# EAGLE board MEMS-preamp_v08 (EAGLE 8.6.1)
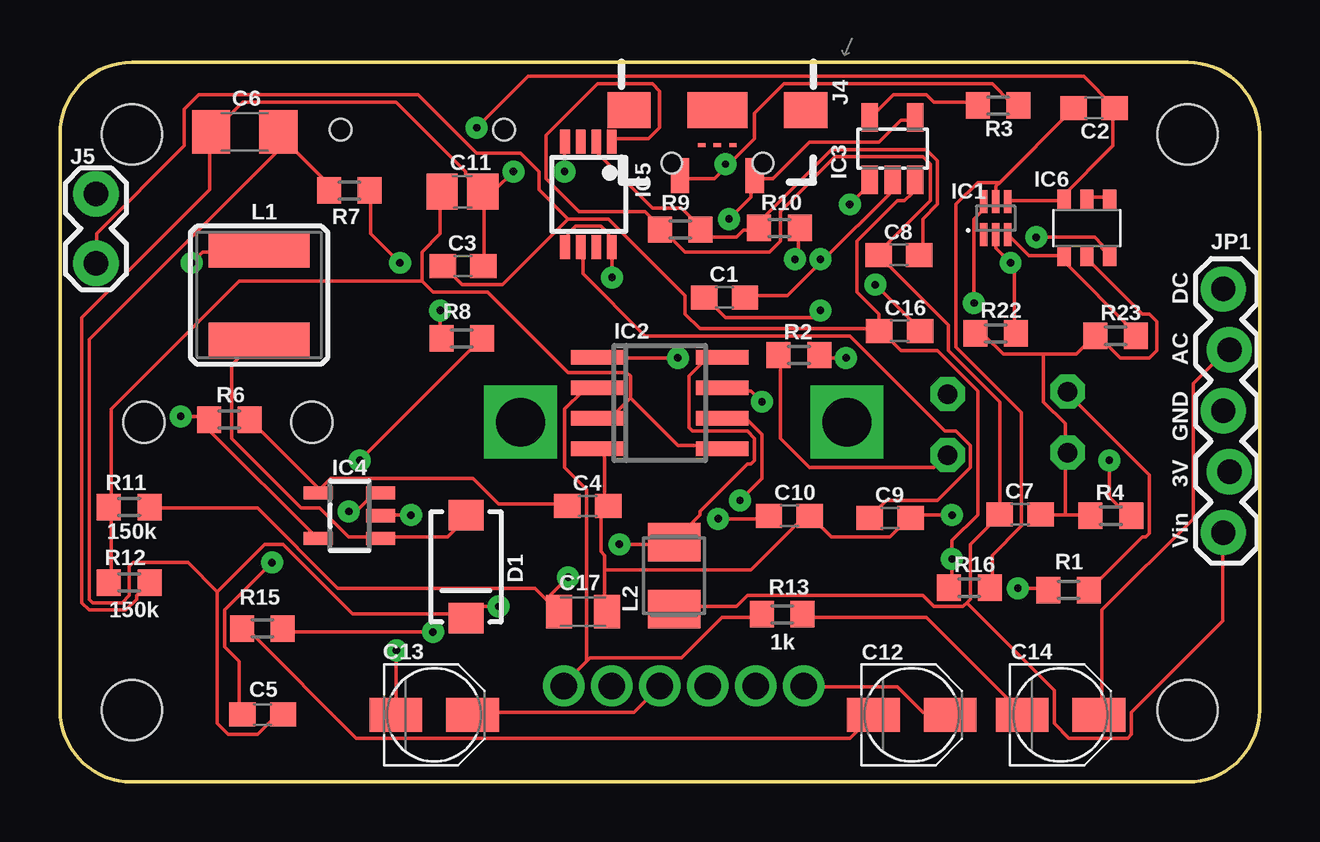
[diagram p0: board, top side]
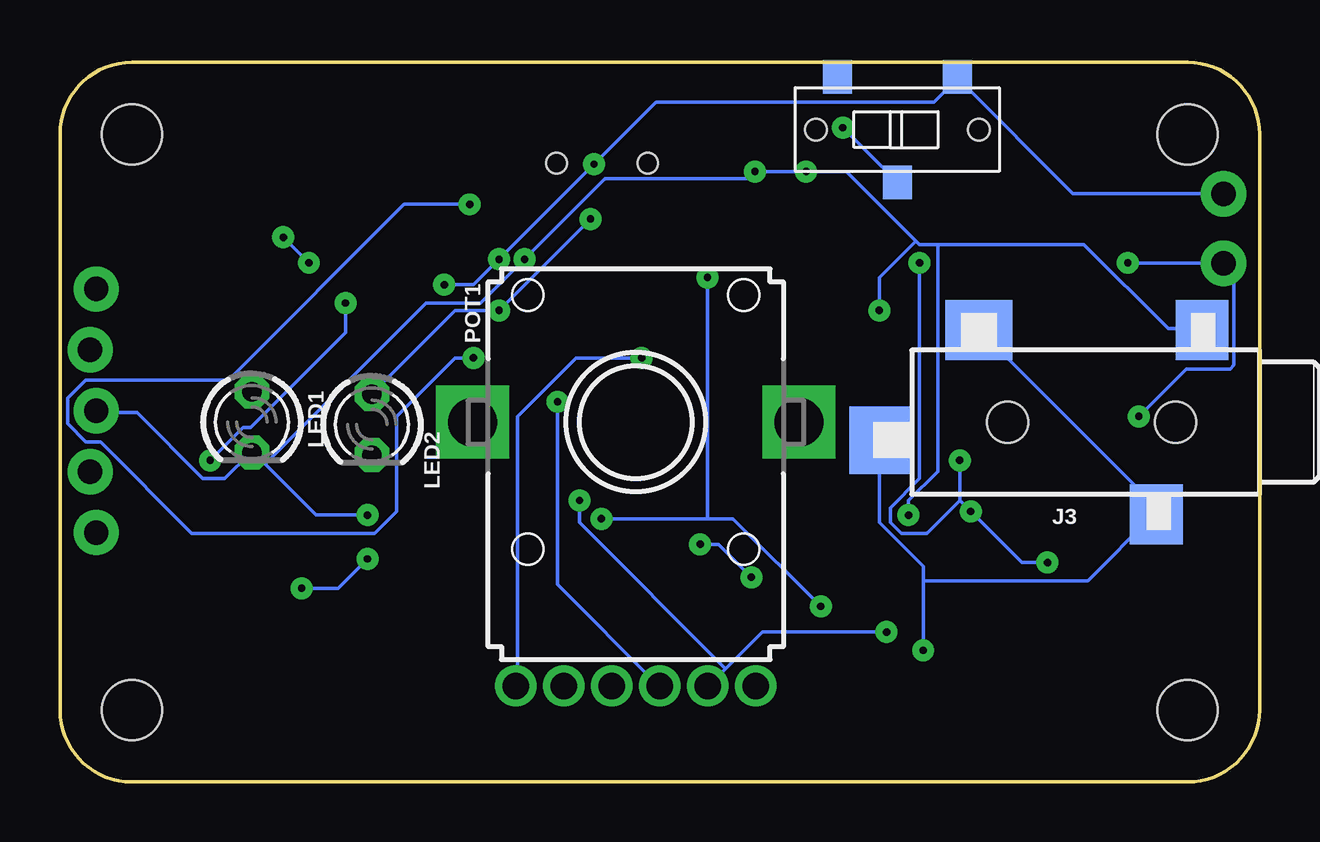
[diagram p1: board, bottom side, seen from below]

Size 50 x 30 mm. Coordinates in mm from the lower left corner, seen from the top.
Outline: 0,3 0,27 arc-90 3,30 47,30 arc-90 50,27 50,3 arc-90 47,0 3,0 arc-90 0,3
Copper layers (1*16): Top 0.035mm / dielectric 1.5mm / Bottom 0.035mm
Design rules "default *": minimum track width 6mil, minimum drill 12mil, track to track 6mil, track to pad 6mil, pad to pad 6mil, via to via 6mil, smd to smd 6mil, copper to edge 6mil, drill to drill 6mil, minimum pad ring 12mil, minimum via ring 12mil, stop-mask expansion 4mil, vias tented up to drill 0mil, thermal gap 10mil
Holes 2.5 mm at 47,27 47,3 3,27 3,3

## Footprints (pad centres in the part's own frame; a part is rotated, then mirrored left to right if it is on the bottom)
C0603 = smd 1.1 x 1: 1 -0.85,0; 2 0.85,0
C1206 = smd 1.6 x 1.8: 1 -1.4,0; 2 1.4,0
C0805 = smd 1.3 x 1.5: 1 -0.85,0; 2 0.85,0
PANASONIC_B = smd 2.2 x 1.4: + 1.6,0; - -1.6,0
C0805K = smd 1.1 x 1.4: 1 -1,0; 2 1,0
SMA-DIODE = smd 1.27 x 1.47: A -2.15,0; C 2.15,0
WSON-6-LONG = smd 0.3 x 0.954: 1 -0.5,-0.686; 2 0,-0.686; 3 0.5,-0.686; 4 0.5,0.686; 5 0,0.686; 6 -0.5,0.686
SO08 = smd 0.6 x 2.2: 1 -1.905,-2.6; 2 -0.635,-2.6; 3 0.635,-2.6; 4 1.905,-2.6; 5 1.905,2.6; 6 0.635,2.6; 7 -0.635,2.6; 8 -1.905,2.6
SOT-23-5 = smd 0.69 x 1.2: 1 -0.95,-1.3; 2 0,-1.3; 3 0.95,-1.3; 4 0.95,1.3; 5 -0.95,1.3
SOT23-5 = smd 0.55 x 1.2: 1 -0.95,-1.3; 2 0,-1.3; 3 0.95,-1.3; 4 0.95,1.3; 5 -0.95,1.3
MSOP-8 = smd 0.4 x 1: 1 -0.975,-2.2; 2 -0.325,-2.2; 3 0.325,-2.2; 4 0.975,-2.2; 5 0.975,2.2; 6 0.325,2.2; 7 -0.325,2.2; 8 -0.975,2.2
SOT457R_PHILIPS = smd 0.55 x 0.8: 1 -0.95,-1.2; 2 0,-1.2; 3 0.95,-1.2; 4 0.95,1.2; 5 0,1.2; 6 -0.95,1.2
TRS_SJ-3524-SMT = smd 2.5 x 2.2: 1 3.85,-4.6; 3 -3.85,-2.7 | smd 2.5 x 2.8: 2 3.85,4.7 | smd 2.8 x 2.5: 4 -0.75,8.85 | hole 1.7: 0,-3.5; 0,3.5
USB-B-MICRO-SMD_RED_PASTE = smd 0.152 x 0.305: D+ 1.455,0; D- 1.455,0.65; ID 1.455,-0.65 | smd 1.45 x 0.762: GND 2.725,-1.554 | smd 1.5 x 1.8: SHIELD1 0,3.685; SHIELD2 0,-3.685 | smd 1.5 x 2.5: SHIELD3 0,0 | smd 1.45 x 0.781: VBUS 2.725,1.554 | hole 0.85: 2.2,1.9; 2.2,-1.9
1X02_LOCK = drill 1.016 pad 1.88: 1 -0.178,0; 2 2.718,0
1X05_LOCK = drill 1.016 pad 1.88: 1 0,0.127; 2 2.54,-0.127; 3 5.08,0.127; 4 7.62,-0.127; 5 10.16,0.127
CR54 = smd 4.2 x 1.4: P$1 0,1.85; P$2 0,-1.85
L3225M = smd 1.6 x 2.2: 1 -1.4,0; 2 1.4,0
LED3MM = drill 0.813 octagon: A -1.27,0; K 1.27,0
PTV112 = drill 1.1 pad 1.676: 1.1 -3,-11; 1.2 -5,-11; 1.3 5,-11; 2.1 -1,-11; 2.2 1,-11; 2.3 3,-11 | drill 2.032 pad 2.8 square: M1 -6.8,0; M2 6.8,0
R0603 = smd 1 x 1.1: 1 -0.85,0; 2 0.85,0
SWITCH_SPDT_CL-SB-12B = smd 1.2 x 1.4: P$1 -2.5,-2.2; P$2 0,2.2; P$3 2.5,-2.2 | hole 0.9: -3.4,0; 3.4,0

## Placement (x,y rotation side)
C1  4.7uF  [C0603]  27.7,20.2 0 top
C2  0.1uF  [C0603]  43.1,28.1 180 top
C3  10uF  [C0603]  16.8,21.5 0 top
C4  56nF  [C0603]  22,11.5 0 top
C5  2.2pF  [C0603]  8.45,2.82 180 top
C6  68uF  [C1206]  7.7,27.1 180 top
C7  10uF  [C0603]  40.02,11.16 0 top
C8  10nF  [C0603]  34.97,21.96 0 top
C9  10nF  [C0603]  34.6,11 0 top
C10  10uF  [C0603]  30.4,11.1 0 top
C11  0.1uF  [C0805]  16.77,24.6 0 top
C12  10uF  [PANASONIC_B]  35.5,2.8 0 top
C13  10uF  [PANASONIC_B]  15.6,2.8 0 top
C14  10uF  [PANASONIC_B]  41.7,2.8 0 top
C16  4.7uF  [C0603]  35,18.8 0 top
C17  0.1uF  [C0805K]  21.8,7.1 0 top
D1  10BQ015  [SMA-DIODE]  16.93,8.97 270 top
IC1  BQ297X  [WSON-6-LONG]  39,23.5 0 top
IC2  OPA2134UA  [SO08]  25,15.8 270 top
IC3  MCP73831  [SOT-23-5]  34.7,26.4 0 top
IC4  SC4503  [SOT23-5]  12.06,11.1 90 top
IC5  TPS7A49  [MSOP-8]  22.02,24.49 180 top
IC6  QS6K1  [SOT457R_PHILIPS]  42.8,23.1 0 top
J3  TRS-1/8"-3.5MM  [TRS_SJ-3524-SMT]  7,15 90 bottom
J4  [USB-B-MICRO-SMD_RED_PASTE]  27.4,28 270 top
J5  Battery  [1X02_LOCK]  1.5,21.8 90 top
JP1  ICS40300  [1X05_LOCK]  48.62,10.39 90 top
L1  2.7uH  [CR54]  8.3,20.3 0 top
L2  100uH/500mA  [L3225M]  25.6,8.6 90 top
LED1  [LED3MM]  42,15 270 bottom
LED2  Charge  [LED3MM]  37,14.9 270 bottom
POT1  20K  [PTV112]  26,15 0 bottom
R1  390  [R0603]  42.04,8 180 top
R2  470  [R0603]  30.8,17.8 0 top
R3  5k  [R0603]  39.1,28.2 180 top
R4  2.2k  [R0603]  43.8,11.1 0 top
R6  15k  [R0603]  7.06,15.1 180 top
R7  1M  [R0603]  12.06,24.66 180 top
R8  100k  [R0603]  16.75,18.49 0 top
R9  100k  [R0603]  25.85,23.03 0 top
R10  11k  [R0603]  29.99,23.09 0 top
R11  150k  [R0603]  2.89,11.46 0 top
R12  150k  [R0603]  2.89,8.31 180 top
R13  1k  [R0603]  30.1,6.99 180 top
R15  1k  [R0603]  8.44,6.39 0 top
R16  330  [R0603]  37.9,8.1 0 top
R22  10M  [R0603]  39,18.7 0 top
R23  10M  [R0603]  44,18.6 0 top
SW3  SPDT  [SWITCH_SPDT_CL-SB-12B]  15.1,27.2 180 bottom

## Library data of the parts
C1-C10 C16 = rcl; SPICEPREFIX: C
C11 C17 = adafruit
C12-C14 = resistor
D1 = SparkFun
IC1 IC3-IC6 J3 R1-R4 R6-R13 R15 R16 R22 R23 SW3 = CMU-ArtFab
IC2 = linear
J4 = CMU-ArtFab; PROD_ID: CONN-11752
J5 = SparkFun-Connectors; G: (-); P: (+)
JP1 = SparkFun-Connectors; CON1: Vin; CON2: 3V; CON3: GND; CON4: AC; CON5: DC
L1 = SparkFun-Passives
L2 = rcl; SPICEPREFIX: L
LED1 LED2 = led
POT1 = CMU-ArtFab; AVAILABILITY: Unavailable; DESCRIPTION: Alt# Tce-10111410; MF: STMicroelectronics; MP: PTV112; PACKAGE: None; PRICE: None

## Nets
+5V: C1.1 IC3.4 J4.VBUS LED2.A
+12V: C7.1 C8.1 IC5.1 JP1.1 L2.1 R9.1
BATGND: C2.1 IC1.4 IC6.6 SW3.P$2
GND: C3.2 C4.2 C6.2 C7.2 C9.2 C10.2 C11.2 C17.2 IC2.4 IC4.2 IC5.4 IC6.2 J3.1 JP1.3 LED1.K R4.1 R8.1 R10.2 R12.1 R22.1 R23.1
N$2: LED1.A R1.1
N$3: C14.+ JP1.4
N$4: C12.- R15.1
N$5: IC2.2 POT1.1.3 R13.2
N$6: IC3.5 R3.2
N$7: C13.- J3.2 J3.3 J3.4
N$8: C11.1 IC2.3 IC2.5 R11.1 R12.2
N$9: C12.+ IC2.1 POT1.1.2
N$10: C13.+ IC2.7 POT1.2.2
N$11: IC6.4 IC6.5
N$12: D1.A IC4.1 L1.P$2
N$13: C4.1 IC4.4 R6.1
N$14: C5.2 IC4.3 R7.1 R8.2
N$15: C17.1 IC2.8 L2.2 R11.2
N$21: IC2.6 POT1.2.3 R15.2
N$22: LED2.K R2.1
N$23: C14.- R13.1
N$25: IC3.1 R2.2
N$27: IC1.3 IC6.1 R23.2
N$31: IC1.2 IC6.3 R22.2
N$34: IC1.6 R4.2
N$42: C2.2 IC1.5 R16.2
N$47: C8.2 IC5.2 R9.2 R10.1
N$48: C9.1 IC5.6
USBGND: C1.2 C16.2 IC3.2 J4.GND J5.2 R3.1 SW3.P$1
V+: C5.1 C6.1 C10.1 D1.C IC5.5 IC5.8 R7.2
VBAT: C3.1 C16.1 IC3.3 IC4.5 J5.1 L1.P$1 R1.2 R6.2 R16.1

## Tracks (layer width: path | path; a pad name or v marks a point on that pad's centre or on a via)
+5V  (via drill 0.3)
  Top 0.152: IC3.4 35.51,27.58 35.05,27.58 34.14,26.67 31.24,26.67 29.72,25.15 28.96,25.15 J4.VBUS 28.8,25.15 28.8,24.38 v27.89,23.47 | v31.7,19.66 31.39,19.36 27.74,19.36 26.98,20.12 C1.1
  Bottom 0.152: LED2.A 36.88,16.31 33.53,19.66 v31.7,19.66 v27.89,23.47
+12V
  Top 0.152: IC5.1 23.01,26.82 24.54,26.82 24.99,27.28 24.99,28.8 24.69,29.11 22.4,29.11 20.27,26.98 20.27,25.15 21.64,23.77 24.38,23.77 24.99,23.16 R9.1 25.15,23.01 26.06,22.1 29.57,22.1 30.02,22.55 30.02,23.77 32.31,26.06 35.97,26.06 36.27,25.76 36.27,24.23 34.14,22.1 C8.1 34.14,21.95 37.03,19.05 37.03,17.98 39.17,15.85 39.17,11.28 C7.1 39.17,11.12 37.95,9.91 37.95,7.62 37.8,7.47 | 37.8,7.47 37.64,7.32 36.42,7.32 35.97,7.77 28.65,7.77 28.19,7.32 25.6,7.32 L2.1 | 37.8,7.47 41.45,3.81 41.45,2.44 42.06,1.83 44.5,1.83 44.65,1.98 44.65,2.9 48.46,6.71 48.46,10.36 JP1.1
BATGND  (via drill 0.3)
  Top 0.152: IC1.4 39.62,24.23 41.76,24.23 IC6.6 41.76,24.38 43.89,26.52 43.89,28.04 C2.1 43.89,28.19 42.67,29.41 19.51,29.41 v17.37,27.28
  Bottom 0.152: v17.37,27.28 15.24,25.15 SW3.P$2
GND  (via drill 0.3)
  Top 0.152: IC2.4 22.4,13.87 22.71,13.56 22.71,11.58 C4.2 22.71,11.43 22.55,11.28 22.55,9.6 22.71,9.45 22.71,8.84 | 22.71,8.84 22.71,7.16 C17.2 | 22.71,8.84 28.8,8.84 30.94,10.97 31.24,10.97 C10.2 31.39,10.97 32.16,10.21 34.59,10.21 35.36,10.97 C9.2 35.51,11.12 v37.19,11.12 | 41.91,11.12 42.82,11.12 R4.1 | 41.91,11.12 41,11.12 C7.2 | 41.91,11.12 41.91,13.72 LED1.K 41.91,13.87 41.91,14.94 41,15.85 41,17.83 | IC6.2 42.82,21.79 45.11,19.51 45.41,19.51 45.72,19.2 45.72,17.98 45.41,17.68 44.2,17.68 43.28,18.59 R23.1 43.13,18.59 42.37,17.83 41,17.83 | 41,17.83 39.32,17.83 38.56,18.59 38.25,18.59 R22.1 | C3.2 17.68,21.64 17.68,24.54 C11.2 | R12.1 3.66,8.23 3.2,7.77 3.2,7.62 2.74,7.16 1.22,7.16 0.91,7.47 0.91,19.36 6.25,24.69 6.25,26.98 C6.2 6.4,27.13 7.62,28.35 14.02,28.35 16.92,25.45 16.92,25.3 17.53,24.69 C11.2 | v21.03,25.45 21.03,26.67 IC5.4 | v15.85,19.66 15.85,18.59 R8.1 | v30.63,21.79 30.79,21.95 30.79,23.01 R10.2 | v14.63,11.12 13.41,11.12 IC4.2 | v18.9,25.45 18.14,24.69 17.68,24.69 C11.2
  Bottom 0.152: JP1.3 48.46,15.39 46.79,15.39 44.04,12.65 43.13,12.65 42.06,13.72 LED1.K 41.91,13.72 41.45,13.26 | v37.19,11.12 39.32,11.12 41.45,13.26 | 14.33,22.55 14.17,22.4 13.41,22.4 | 14.33,22.55 17.22,25.45 v18.9,25.45 v21.03,25.45 21.34,25.15 27.28,25.15 v30.63,21.79 32.46,19.96 34.75,19.96 41.45,13.26 | 13.41,22.4 7.32,22.4 3.81,18.9 2.44,18.9 J3.1 | v15.85,19.66 15.85,21.03 14.33,22.55 | v14.63,11.12 14.63,11.73 13.41,12.95 13.41,22.4
N$2
  Top 0.152: R1.1 42.98,8.08 45.11,10.21 45.26,10.21 45.41,10.36 45.41,12.8 42.06,16.15 LED1.A
N$3
  Top 0.152: C14.+ 43.43,2.9 43.43,7.16 47.24,10.97 47.24,16.61 48.62,17.98 JP1.4
N$4
  Top 0.152: R15.1 7.62,6.25 7.92,6.25 12.34,1.83 32.92,1.83 33.83,2.74 C12.-
N$5
  Top 0.152: 21.95,5.03 21.03,4.12 POT1.1.3 | 21.95,5.03 22.1,5.18 25.91,5.18 27.58,6.86 29.11,6.86 R13.2 | 21.95,5.03 21.95,12.19 21.03,13.11 21.03,15.54 21.79,16.31 22.25,16.31 IC2.2
N$6
  Top 0.152: R3.2 38.1,28.35 36.42,28.35 36.12,28.65 34.75,28.65 33.83,27.74 IC3.5
N$7  (via drill 0.3)
  Top 0.152: v14.02,5.49 14.02,2.9 C13.-
  Bottom 0.152: 14.02,8.38 14.02,8.99 15.85,10.82 15.85,14.17 J3.4 | 14.02,8.38 v14.02,5.49 | J3.2 11.58,18.75 4.42,11.58 4.42,11.28 J3.3 4.42,11.12 7.16,8.38 14.02,8.38
N$8
  Top 0.152: R12.2 2.13,8.38 2.13,11.43 R11.1 2.13,11.58 2.13,15.54 7.47,20.88 15.09,20.88 | 15.09,20.88 15.09,22.1 15.85,22.86 15.85,24.54 C11.1 | 15.09,20.88 15.54,20.42 17.83,20.42 21.18,17.07 23.62,17.07 23.77,16.92 23.77,16 | 23.77,16 23.01,15.24 22.4,15.24 IC2.3 | 23.77,16 25.76,14.02 27.58,14.02 IC2.5
N$9  (via drill 0.3)
  Top 0.152: v25.76,17.68 22.4,17.68 IC2.1 | C12.+ 37.03,2.9 35.97,2.9 34.9,3.96 31.09,3.96 POT1.1.2
  Bottom 0.152: v25.76,17.68 28.5,17.68 30.94,15.24 30.94,4.12 POT1.1.2
N$10  (via drill 0.3)
  Top 0.152: C13.+ 17.22,2.9 23.93,2.9 24.99,3.96 POT1.2.2 | v29.26,15.85 28.8,16.31 27.74,16.31 IC2.7
  Bottom 0.152: v29.26,15.85 29.26,8.23 25.15,4.12 POT1.2.2
N$11
  Top 0.152: IC6.5 42.82,24.38 43.74,24.38 IC6.4
N$12
  Top 0.152: D1.A 16.92,10.97 16.15,10.21 13.41,10.21 IC4.1 13.26,10.21 12.04,10.21 10.82,11.43 10.06,11.43 7.16,14.33 7.16,17.37 8.23,18.44 L1.P$2
N$13
  Top 0.152: 10.82,12.19 7.92,15.09 R6.1 | 10.82,12.19 11.28,12.65 17.22,12.65 18.29,11.58 21.03,11.58 C4.1 | 10.82,12.19 IC4.4
N$14  (via drill 0.3)
  Top 0.152: v8.84,9.14 6.86,7.16 6.86,5.64 7.47,5.03 7.47,2.9 C5.2 | v12.04,11.28 12.34,11.28 13.26,12.19 IC4.3 | v12.5,13.41 17.53,18.44 R8.2 | v14.17,21.64 12.95,22.86 12.95,24.54 R7.1
  Bottom 0.152: v8.84,9.14 9.91,9.14 v12.04,11.28 12.5,11.73 | 12.5,11.73 v12.5,13.41 | v14.17,21.64 14.17,12.65 15.39,11.43 15.39,10.82 14.94,10.36 13.87,10.36 12.5,11.73
N$15  (via drill 0.3)
  Top 0.152: IC2.8 27.58,17.68 26.98,17.68 26.21,16.92 26.21,14.78 26.36,14.63 28.65,14.63 28.96,14.33 28.96,13.41 28.8,13.26 28.65,13.26 26.67,11.28 26.67,11.12 25.6,10.06 L2.2 25.45,9.91 v23.32,9.91 | 20.27,7.62 20.73,7.16 C17.1 20.27,7.62 | 20.27,7.62 19.81,8.08 11.58,8.08 8.23,11.43 3.81,11.43 R11.2 | 20.27,7.62 v21.18,8.53
  Bottom 0.152: v23.32,9.91 22.55,9.91 v21.18,8.53
N$21  (via drill 0.3)
  Top 0.152: v15.54,6.25 9.3,6.25 R15.2 | v28.35,11.73 29.26,12.65 29.26,14.48 28.65,15.09 27.74,15.09 IC2.6
  Bottom 0.152: v15.54,6.25 20.73,6.25 22.25,4.72 | 22.25,4.72 22.86,4.12 POT1.2.3 | v28.35,11.73 28.35,10.82 22.25,4.72
N$22
  Top 0.152: R2.1 30.02,17.68 30.02,14.33 31.24,13.11 36.42,13.11 36.88,13.56 LED2.K
N$23
  Top 0.152: R13.1 31.09,6.86 36.12,6.86 40.08,2.9 C14.-
N$25  (via drill 0.3)
  Top 0.152: v32.77,17.68 31.7,17.68 R2.2 | v32.92,24.08 33.83,24.99 IC3.1
  Bottom 0.152: v32.77,17.68 33.53,17.68 35.97,15.24 35.97,11.28 36.88,10.36 44.5,10.36 48.31,14.17 48.92,14.17 49.68,14.94 49.68,16 48.92,16.76 42.98,16.76 35.66,24.08 v32.92,24.08
N$27
  Top 0.152: IC1.3 39.62,22.71 40.39,21.95 41.76,21.95 IC6.1 41.76,21.79 44.81,18.75 R23.2
N$31  (via drill 0.3)
  Top 0.152: v40.69,22.71 43.13,22.71 43.43,22.4 43.43,22.25 43.74,21.95 IC6.3 | IC1.2 39.01,22.71 39.01,22.25 v39.62,21.64 39.78,21.49 39.78,18.75 R22.2
  Bottom 0.152: v39.62,21.64 v40.69,22.71
N$34  (via drill 0.3)
  Top 0.152: v38.1,19.96 38.1,23.47 38.41,23.77 38.41,24.08 IC1.6 | v43.74,13.41 43.74,11.89 44.5,11.12 R4.2
  Bottom 0.152: v38.1,19.96 38.1,18.75 42.06,14.78 42.37,14.78 v43.74,13.41
N$42
  Top 0.152: 39.17,24.99 42.22,28.04 C2.2 | 39.17,24.99 39.01,24.84 39.01,24.23 IC1.5 | 39.17,24.99 38.25,24.99 37.34,24.08 37.34,18.14 40.08,15.39 40.08,10.67 38.86,9.45 38.86,8.23 R16.2
N$47
  Top 0.152: IC5.2 22.4,26.67 22.4,26.21 24.69,23.93 25.91,23.93 26.67,23.16 R9.2 26.82,23.01 27.13,22.71 28.19,22.71 28.5,23.01 29.11,23.01 R10.1 29.26,23.16 29.26,23.47 32.16,26.36 36.12,26.36 36.58,25.91 36.58,24.08 35.97,23.47 35.97,22.1 C8.2
N$48
  Top 0.152: IC5.6 21.79,22.25 21.79,21.18 24.38,18.59 32.92,18.59 36.88,14.63 37.34,14.63 37.95,14.02 37.95,13.11 36.58,11.73 34.44,11.73 33.83,11.12 C9.1
USBGND  (via drill 0.3)
  Top 0.152: 27.89,25.76 27.28,25.15 25.91,25.15 J4.GND | 27.89,25.76 28.96,26.82 28.96,27.89 30.18,29.11 38.86,29.11 39.62,28.35 39.93,28.35 R3.1 | 31.85,21.79 34.59,24.54 34.59,24.99 IC3.2 | 31.85,21.79 30.33,20.27 28.65,20.27 C1.2 | v33.98,20.73 35.81,18.9 C16.2 | v31.7,21.79 31.85,21.79 | v27.74,25.76 27.89,25.76
  Bottom 0.152: v33.98,20.73 32.77,20.73 v31.7,21.79 v27.74,25.76 25.15,28.35 13.56,28.35 12.65,29.26 SW3.P$1 12.5,29.26 7.77,24.54 1.52,24.54 J5.2
V+  (via drill 0.3)
  Top 0.152: 9.45,26.67 9.14,26.98 C6.1 9.45,26.67 | 9.45,26.67 11.12,24.99 11.12,24.69 R7.2 | IC5.5 21.18,22.4 21.18,22.86 21.49,23.16 22.55,23.16 22.86,22.86 22.86,22.4 IC5.8 23.01,22.25 v23.01,21.03 | 6.55,7.92 6.55,2.44 7.01,1.98 8.23,1.98 8.99,2.74 9.3,2.74 C5.1 | 6.55,7.92 8.53,9.91 9.3,9.91 12.19,7.01 16.76,7.01 16.92,6.86 D1.C 17.07,6.86 17.53,7.32 v18.29,7.32 | v27.43,10.97 29.41,10.97 C10.1 | 9.45,26.67 1.22,18.44 1.22,7.62 1.37,7.47 2.59,7.47 2.9,7.77 2.9,8.99 3.05,9.14 5.33,9.14 6.55,7.92
  Bottom 0.152: 23.01,10.97 21.95,10.97 v18.29,7.32 | 23.01,10.97 v27.43,10.97 | 23.01,10.97 v23.01,21.03
VBAT  (via drill 0.3)
  Top 0.152: IC4.5 10.67,10.21 6.25,14.63 6.25,15.09 R6.2 6.1,15.24 v5.03,15.24 | 34.14,18.9 34.14,19.51 33.22,20.42 33.22,22.55 34.9,24.23 35.2,24.23 35.51,24.54 35.51,24.99 IC3.3 | 21.18,23.47 18.44,20.73 16.76,20.73 16,21.49 C3.1 | 21.18,23.47 22.86,23.47 26.06,20.27 26.06,19.51 26.67,18.9 34.14,18.9 | 34.14,18.9 C16.1 34.29,18.75 35.05,17.98 36.58,17.98 38.25,16.31 38.25,11.12 37.19,10.06 v37.19,9.3 37.19,8.23 R16.1 | v39.93,8.08 41.15,8.08 R1.2 | 21.18,23.47 19.96,24.69 19.96,25.45 19.2,26.21 17.37,26.21 14.94,28.65 5.79,28.65 5.18,28.04 5.18,26.52 1.52,22.86 1.52,21.64 J5.1 | v5.49,21.64 5.94,22.1 8.23,22.1 L1.P$1
  Bottom 0.152: v39.93,8.08 38.41,8.08 v37.19,9.3 | v5.49,21.64 1.52,21.64 J5.1 1.37,21.49 1.07,21.18 1.07,17.37 1.22,17.22 3.05,17.22 v5.03,15.24

## Text on the board
bValues: ON | OFF